# EAGLE board coolrunner_bob (EAGLE 6.4)
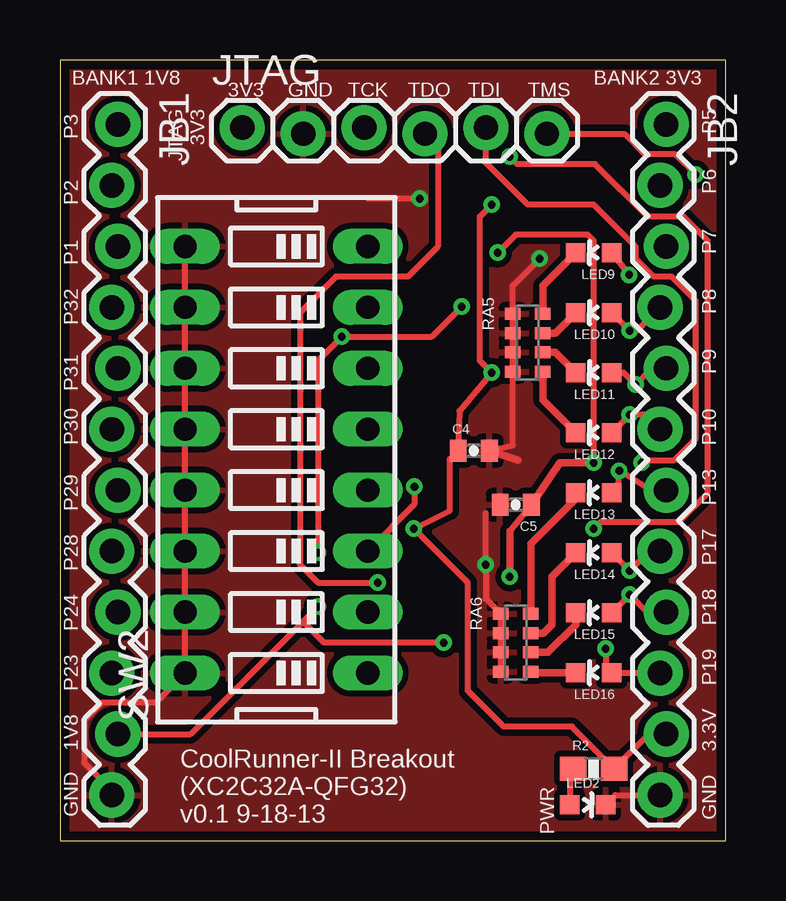
[diagram p0: board, top side]
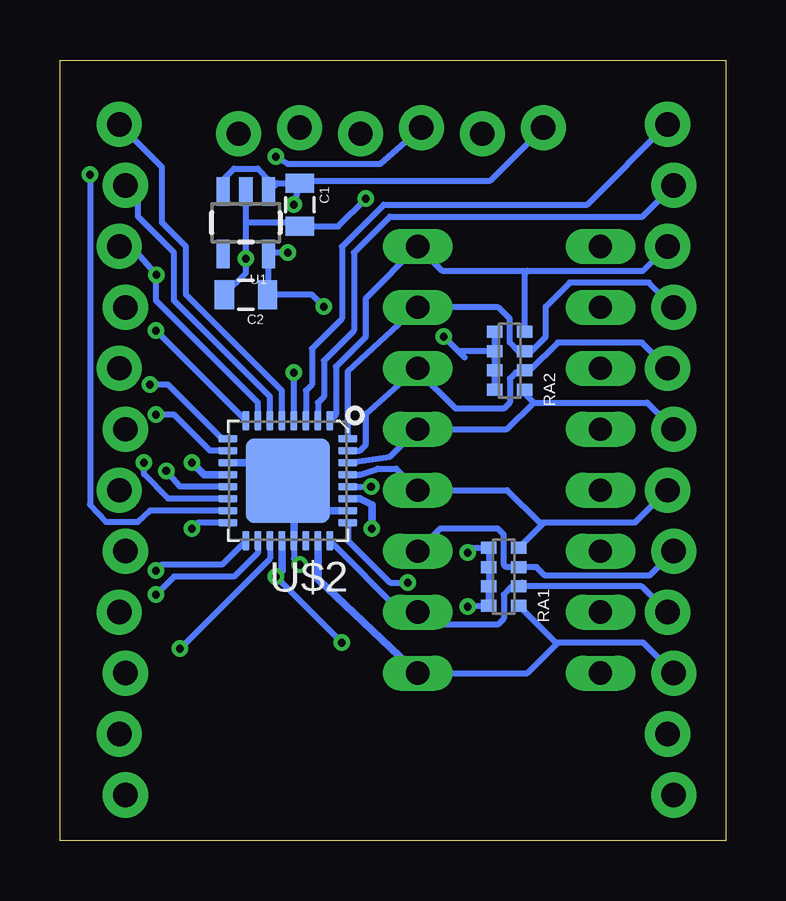
[diagram p1: board, bottom side, seen from below]

Size 27.75 x 32.53 mm. Coordinates in mm from the lower left corner, seen from the top.
Outline: 0,0 27.75,0 27.75,32.53 0,32.53 0,0
Copper layers (1*16): Top 0.0356mm / dielectric 1.5011mm / Bottom 0.0356mm
Design rules "OSHPark_mine": minimum track width 6mil, minimum drill 13mil, track to track 6mil, track to pad 6mil, pad to pad 6mil, via to via 6mil, smd to smd 6mil, copper to edge 15mil, drill to drill 6mil, minimum pad ring 7mil, minimum via ring 7mil, stop-mask expansion 2mil, vias tented up to drill 13mil, thermal gap 10mil

## Footprints (pad centres in the part's own frame; a part is rotated, then mirrored left to right if it is on the bottom)
0805 = smd 0.8 x 1.2: 1 -0.9,0; 2 0.9,0
0402-CAP = smd 0.7 x 0.9: 1 -0.65,0; 2 0.65,0
1X12_LOCK = drill 1.016 pad 1.88: 1 0,0.127; 2 2.54,-0.127; 3 5.08,0.127; 4 7.62,-0.127; 5 10.16,0.127; 6 12.7,-0.127; 7 15.24,0.127; 8 17.78,-0.127; 9 20.32,0.127; 10 22.86,-0.127; 11 25.4,0.127; 12 27.94,-0.127
1X06_LOCK = drill 1.016 pad 1.88: 1 0,0; 2 2.54,-0.254; 3 5.08,0; 4 7.62,-0.254; 5 10.16,0; 6 12.7,-0.254
LED-0603 = smd 0.8 x 0.8: A 0,-0.75; C 0,0.75
0603-RES = smd 1.1 x 1: 1 -0.85,0; 2 0.85,0
0603-ARV = smd 0.5 x 0.65: 1 -1.2,-0.625; 2 -0.4,-0.625; 3 0.4,-0.625; 4 1.2,-0.625; 5 1.2,0.625; 6 0.4,0.625; 7 -0.4,0.625; 8 -1.2,0.625
DIPSWITCH-08 = drill 0.97 long: 1 -8.89,-3.81; 2 -6.35,-3.81; 3 -3.81,-3.81; 4 -1.27,-3.81; 5 1.27,-3.81; 6 3.81,-3.81; 7 6.35,-3.81; 8 8.89,-3.81; 9 8.89,3.81; 10 6.35,3.81; 11 3.81,3.81; 12 1.27,3.81; 13 -1.27,3.81; 14 -3.81,3.81; 15 -6.35,3.81; 16 -8.89,3.81
SOT23-5 = smd 0.55 x 1.2: 1 -0.95,-1.3; 2 0,-1.3; 3 0.95,-1.3; 4 0.95,1.3; 5 -0.95,1.3
QFN32-5X5 = smd 0.3 x 0.8: 1 -1.75,-2.5; 2 -1.25,-2.5; 3 -0.75,-2.5; 4 -0.25,-2.5; 5 0.25,-2.5; 6 0.75,-2.5; 7 1.25,-2.5; 8 1.75,-2.5; 17 1.75,2.5; 18 1.25,2.5; 19 0.75,2.5; 20 0.25,2.5; 21 -0.25,2.5; 22 -0.75,2.5; 23 -1.25,2.5; 24 -1.75,2.5 | smd 0.8 x 0.3: 9 2.5,-1.75; 10 2.5,-1.25; 11 2.5,-0.75; 12 2.5,-0.25; 13 2.5,0.25; 14 2.5,0.75; 15 2.5,1.25; 16 2.5,1.75; 25 -2.5,1.75; 26 -2.5,1.25; 27 -2.5,0.75; 28 -2.5,0.25; 29 -2.5,-0.25; 30 -2.5,-0.75; 31 -2.5,-1.25; 32 -2.5,-1.75 | smd 3.5 x 3.5: EXP 0,0

## Placement (x,y rotation side)
C1  10uF  [0805]  17.75,26.5 270 bottom
C2  10uF  [0805]  20,22.75 180 bottom
C4  100nF  [0402-CAP]  17.25,16.25 0 top
C5  100nF  [0402-CAP]  19,14 180 top
JB1  M12LOCK  [1X12_LOCK]  2.29,29.84 270 top
JB2  M12LOCK  [1X12_LOCK]  25.15,29.84 270 top
JTAG  [1X06_LOCK]  7.6,29.71 0 top
LED2  [LED-0603]  22,1.5 270 top
LED9  [LED-0603]  22.25,24.5 90 top
LED10  [LED-0603]  22.25,22 90 top
LED11  [LED-0603]  22.25,19.5 90 top
LED12  [LED-0603]  22.25,17 90 top
LED13  [LED-0603]  22.25,14.5 90 top
LED14  [LED-0603]  22.25,12 90 top
LED15  [LED-0603]  22.25,9.5 90 top
LED16  [LED-0603]  22.25,7 90 top
R2  100  [0603-RES]  22.25,3 0 top
RA1  10k  [0603-ARV]  9.25,11 90 bottom
RA2  10k  [0603-ARV]  9,20 90 bottom
RA5  100  [0603-ARV]  19.5,20.75 270 top
RA6  100  [0603-ARV]  19,8.25 270 top
SW2  [DIPSWITCH-08]  9.03,15.88 90 top
U1  1V8_SOT235  [SOT23-5]  20,25.75 180 bottom
U$2  XC2C32A-QFG32  [QFN32-5X5]  18.25,15 180 bottom

## Library data of the parts
C1 C2 C4 C5 = SparkFun-Capacitors
JB1 JB2 JTAG = SparkFun-Connectors
LED2 LED9-LED16 = SparkFun-LED
R2 RA1 RA2 RA5 RA6 U$2 = kmod
SW2 = SparkFun-Electromechanical
U1 = SparkFun-PowerIC

## Nets
1.8V: C2.1 C5.1 JB1.11 RA1.5 RA1.6 RA1.7 RA1.8 RA2.5 RA2.6 RA2.7 RA2.8 U1.5 U$2.12 U$2.20
3.3V: C1.1 C4.1 JB2.11 JTAG.1 R2.2 U1.1 U1.3 U$2.4 U$2.27
GND: C1.2 C2.2 C4.2 C5.2 JB1.12 JB2.12 JTAG.2 LED2.C RA5.1 RA5.2 RA5.3 RA5.4 RA6.1 RA6.2 RA6.3 RA6.4 SW2.9 SW2.10 SW2.11 SW2.12 SW2.13 SW2.14 SW2.15 SW2.16 U1.2 U$2.11 U$2.21 U$2.26 U$2.EXP
N$2: LED2.A R2.1
N$13: LED16.C RA6.5
N$14: LED15.C RA6.6
N$15: LED14.C RA6.7
N$16: LED13.C RA6.8
N$17: LED12.C RA5.5
N$18: LED11.C RA5.6
N$19: LED10.C RA5.7
N$20: LED9.C RA5.8
P1: JB1.3 RA2.4 SW2.8 U$2.1
P2: JB1.2 U$2.2
P3: JB1.1 U$2.3
P5: JB2.1 U$2.5
P6: JB2.2 U$2.6
P7: JB2.3 LED9.A U$2.7
P8: JB2.4 LED10.A U$2.8
P9: JB2.5 LED11.A U$2.9
P10: JB2.6 LED12.A U$2.10
P13: JB2.7 LED13.A U$2.13
P17: JB2.8 LED14.A U$2.17
P18: JB2.9 LED15.A U$2.18
P19: JB2.10 LED16.A U$2.19
P23: JB1.10 RA1.1 SW2.1 U$2.23
P24: JB1.9 RA1.2 SW2.2 U$2.24
P28: JB1.8 RA1.3 SW2.3 U$2.28
P29: JB1.7 RA1.4 SW2.4 U$2.29
P30: JB1.6 RA2.1 SW2.5 U$2.30
P31: JB1.5 RA2.2 SW2.6 U$2.31
P32: JB1.4 RA2.3 SW2.7 U$2.32
TCK: JTAG.3 U$2.16
TDI: JTAG.5 U$2.14
TDO: JTAG.4 U$2.25
TMS: JTAG.6 U$2.15

## Tracks (layer width: path | path; a pad name or v marks a point on that pad's centre or on a via)
1.8V  (via drill 0.33)
  Top 0.254: 18.75,12.9 C5.1 | 10.12,9.12 5.45,4.45 JB1.11 2.96,4.45 | v16,8.25 11,8.25 10.12,9.12 | v22.25,15.75 22.25,25 22,25.25 19,25.25 v18.25,24.5 | v16.75,22.25 15.5,21 v11.75,21 10.75,20 v10.75,12 | 10.12,9.12 v10.75,9.75
  Top 0.305: v18.75,11 18.75,12.9 | v22.25,15.75 20.85,15.75 C5.1
  Bottom 0.254: RA2.8 RA2.7 RA2.6 | RA2.6 RA2.5 | v18.75,11 v16,8.25 | U1.5 19.05,22.8 C2.1 17.25,22.75 v16.75,22.25 | 10.88,20.12 v11.75,21 11.15,20.4 RA2.6 | v18.25,24.5 19,24.5 | v10.75,12 10.55,12.2 RA1.5 RA1.6 RA1.7 RA1.8 10.7,9.8 v10.75,9.75
  Bottom 0.305: U$2.12 21.75,15.25 v22.25,15.75 | U$2.20 18.5,11.25 v18.75,11
3.3V  (via drill 0.33)
  Top 0.254: v18,26.5 17.5,26 17.5,20 v18,19.5 16.65,17.9 C4.1 16.25,15.9 16.25,13.75 v14.75,13 17,10.75 17,6.25 18.5,4.75 21.35,4.75 R2.2 24.55,4.45 JB2.11
  Bottom 0.254: C1.1 18.7,27.4 U1.1 19.05,27.55 19.5,28 20.5,28 20.95,27.55 U1.3 | C1.1 17.9,27.5 9.81,27.5 JTAG.1 | U$2.4 v18,19.5 | v18,26.5 C1.1
  Bottom 0.305: U$2.27 15.25,14.25 14.75,14 v14.75,13
GND  (via drill 0.33)
  Top 0.254: 17.75,13.65 v17.75,11.5 17.75,10.07 RA6.1 RA6.2 RA6.3 RA6.4 | JB1.12 2.16,2.09 1,3.25 1,5 1.75,5.75 3.98,5.75 SW2.16 SW2.15 SW2.14 SW2.13 SW2.12 SW2.11 SW2.10 SW2.9 5.45,24.77 | v15,26.75 12.85,26.75 | C4.2 18.88,16.48 RA5.4 RA5.3 RA5.2 RA5.1 18.88,23.12 v20,24.25 | LED2.C 23.16,1.91 JB2.12
  Top 0.305: C4.2 19.1,15.85
  Bottom 0.254: 19,15.75 U$2.EXP | 18,14.75 U$2.EXP | 17,13.75 U$2.EXP | U$2.21 18,11.75 v17.75,11.5 | C2.2 20,23.65 v20,24.25 20,25.75 | 20,25.75 U1.2 | 20,25.75 18.15,25.75 C1.2 16.15,25.6 v15,26.75
  Bottom 0.305: U$2.11 19,15.75 | U$2.21 18,14.75 | U$2.26 17,13.75
  pour Top (isolate 0.254): 0,32.5 27.75,32.5 27.75,0 0,0
N$2
  Top 0.254: R2.1 21.25,2.85 LED2.A
N$13
  Top 0.305: RA6.5 19.68,7 LED16.C
N$14
  Top 0.305: RA6.6 20.35,7.85 21.5,9 LED15.C
N$15
  Top 0.305: RA6.7 20.15,8.65 20.5,9 20.5,11 LED14.C
N$16
  Top 0.305: LED13.C 21.5,14.25 19.62,12.38 RA6.8
N$17
  Top 0.305: RA5.5 20.12,18.38 LED12.C
N$18
  Top 0.305: RA5.6 20.65,20.35 LED11.C
N$19
  Top 0.305: RA5.7 20.65,21.15 LED10.C
N$20
  Top 0.305: LED9.C 20.12,23.12 RA5.8
P1
  Bottom 0.254: JB1.3 3.43,23.75 8.25,23.75 | 8.25,23.75 11.82,23.75 SW2.8 15,22.6 15,21 16.25,19.75 16.25,17.75 U$2.1 | RA2.4 8.38,23.62 8.25,23.75
P2
  Bottom 0.254: JB1.2 3.47,26 14,26 15.5,24.5 15.5,21.25 16.75,20 16.75,18.5 17,18.25 U$2.2
P3
  Bottom 0.254: JB1.1 5.76,26.5 14.25,26.5 16,24.75 16,21.75 17.25,20.5 17.25,19 17.5,18.75 U$2.3
P5
  Bottom 0.254: U$2.5 18.5,18.75 22.5,22.75 22.5,24.75 23.5,25.75 23.5,28.07 JB2.1
P6
  Bottom 0.254: U$2.6 19,18.5 23,22.5 23,24.5 24.5,26 24.5,26.78 JB2.2
P7  (via drill 0.33)
  Top 0.254: v23.73,23.58 LED9.A
  Bottom 0.254: U$2.7 19.5,18.25 23.75,22.5 v23.73,23.58 24.77,24.77 JB2.3
P8  (via drill 0.33)
  Top 0.254: LED10.A v23.75,21.25 24.05,21.25 JB2.4
  Bottom 0.254: U$2.8 v23.75,21.25
P9  (via drill 0.33)
  Top 0.254: JB2.5 24.68,19.68 v24,19 23.5,19.5 LED11.A
  Bottom 0.254: U$2.9 21,16.75 23.25,19 v24,19
P10  (via drill 0.33)
  Top 0.254: LED12.A v23.75,17.75 24.42,17.75 JB2.6
  Bottom 0.254: U$2.10 21.5,16.25 23,17.75 v23.75,17.75
P13  (via drill 0.33)
  Top 0.254: LED13.A 23.25,14.5 v23.32,15.41 24.64,14.61 JB2.7
  Bottom 0.254: U$2.13 22.75,14.75 v23.32,15.41
P17  (via drill 0.33)
  Top 0.254: LED14.A v23.75,11.25 24.57,12.06 JB2.8
  Bottom 0.254: U$2.17 21,11.5 23.5,11.5 v23.75,11.25
P18  (via drill 0.33)
  Top 0.254: LED15.A v23.75,10.25 24.48,9.53 JB2.9
  Bottom 0.254: U$2.18 19.5,12 20.5,11 23,11 v23.75,10.25
P19  (via drill 0.33)
  Top 0.254: v22.75,8 22.75,7.25 LED16.A 25.01,7 JB2.10
  Bottom 0.254: U$2.19 19,11.75 v22.75,8
P23
  Bottom 0.254: JB1.10 3.43,8.25 7,8.25 | 7,8.25 7.08,8.25 RA1.1 | SW2.1 8.27,6.99 7,8.25
  Bottom 0.305: U$2.23 17,10.9 SW2.1
P24
  Bottom 0.254: 8.47,10.75 RA1.2 | JB1.9 3.49,10.6 RA1.2 | RA1.2 8.9,10.6 9.25,10.25 9.25,9.25 9.5,9 12.31,9 SW2.2 13.53,9.53 U$2.24
P28  (via drill 0.33)
  Top 0.254: v14.78,14.75 14.78,14.01 SW2.3
  Bottom 0.254: U$2.28 v14.78,14.75 | JB1.8 3.18,11.05 7.53,11.05 7.88,11.4 RA1.3 9.15,11.4 9.25,11.5 9.25,12.75 9.5,13 11.9,13 SW2.3
P29
  Bottom 0.254: U$2.29 15.25,15.25 14.5,15.5 13.73,15.5 SW2.4 9.11,14.61 7.75,13.25 | JB1.7 3.77,13.25 7.58,13.25 | 7.58,13.25 7.66,13.16 | 7.66,13.16 RA1.4 | 7.75,13.25 7.66,13.16 | 7.58,13.25 7.75,13.25
P30
  Bottom 0.254: U$2.30 14,16 13.98,16 SW2.5 9.11,17.14 8,18.25 | JB1.6 3.27,18.25 8,18.25 | 8,18.25 8.38,18.62 RA2.1
P31
  Bottom 0.254: U$2.31 15.25,16.25 15,16.5 15,17.77 SW2.6 12.84,19.59 11.25,18 9.25,18 9,18.25 9,19.25 8.75,19.5 8.47,19.5 RA2.2 8.15,19.6 7,20.75 3.48,20.75 JB1.5
P32
  Bottom 0.254: U$2.32 15.75,19.56 SW2.7 9.47,22.23 9,21.75 9,20.75 8.65,20.4 RA2.3 8.1,20.4 7.5,21 7.5,22.25 6.5,23.25 3.19,23.25 JB1.4
TCK  (via drill 0.33)
  Top 0.254: 12.79,29.71 JTAG.3 | v22.25,13 22.54,13.29 25.81,13.29 27,14.48 27,25 26,26 24.5,26 22.31,28.19 19.06,28.19 v18.75,28.5
  Bottom 0.254: U$2.16 22,13.25 v22.25,13 | v18.75,28.5 18.25,28.2 14.39,28.2 JTAG.3
TDI  (via drill 0.33)
  Top 0.254: v24.25,15.75 24.36,15.86 25.62,15.86 26.5,16.74 26.5,22.5 25.5,23.5 24.75,23.5 24,24.25 24,24.75 22.25,26.5 19.5,26.5 17.76,28.24 JTAG.5
  Bottom 0.254: U$2.14 23.25,14.25 24.23,15.26 24.25,15.28 v24.25,15.75
TDO  (via drill 0.33)
  Top 0.254: JTAG.4 15.75,28.93 15.75,24.75 14.5,23.5 11.5,23.5 10,22 10,11.5 10.75,10.75 v13.25,10.75
  Bottom 0.254: U$2.25 15.75,12.5 14,10.75 v13.25,10.75
TMS  (via drill 0.33)
  Top 0.254: JTAG.6 23.54,29.46 24.37,28.62 25.62,28.62 v26.5,27.75
  Bottom 0.254: v26.5,27.75 26.5,14 25.83,13.29 24.49,13.29 24,13.75 U$2.15

## Text on the board
tPlace: BANK1 1V8 | BANK2 3V3 | 3V3 | GND | TCK | TDO | TDI | TMS | JTAG / 3V3 | P5 | P3 | P6 | P2 | P7 | P1 | P8 | P32 | P9 | P31 | P10 | P30 | P13 | P29 | P17 | P28 | P18 | P24 | P19 | P23 | 3.3V | 1V8 | GND | PWR | GND | CoolRunner-II Breakout / (XC2C32A-QFG32) / v0.1 9-18-13